# Altium PCB PCBdrone.PcbDoc
Units mm, origin at the board's own origin, x right, y up, seen from the top; angles counter-clockwise.
Board outline 100 x 100 mm, 2 copper layers (Top Layer, Bottom Layer); 56 components, 43 nets, 188 pads, 28 vias.
Unrouted connection lines stored in the file: 23.
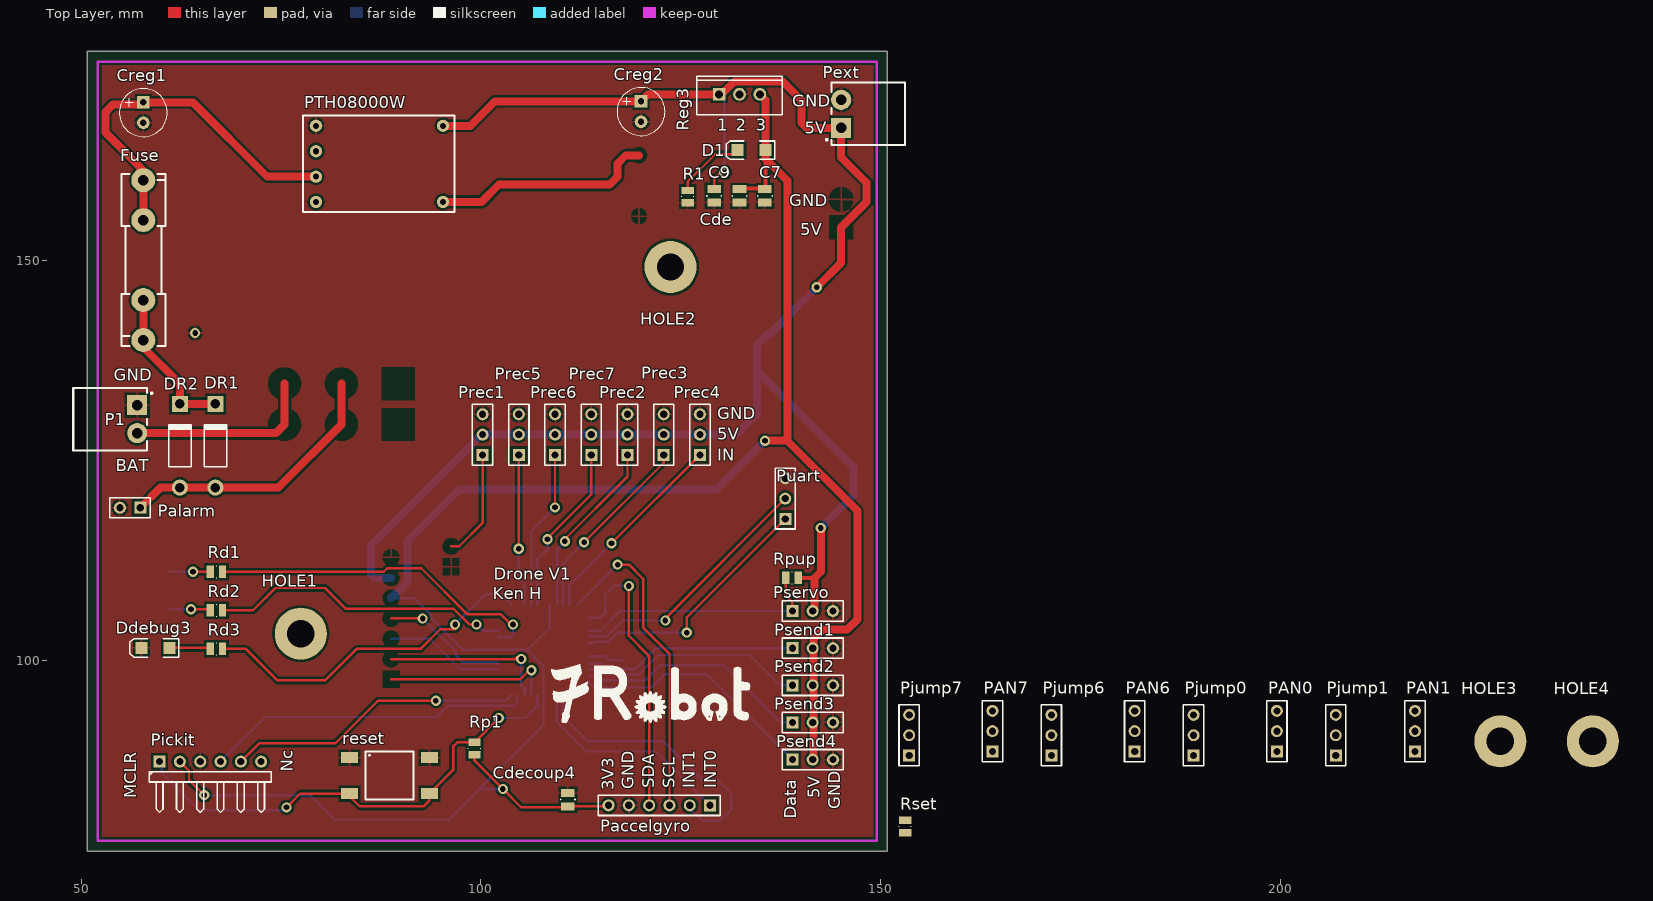
[diagram p0: Top Layer view]
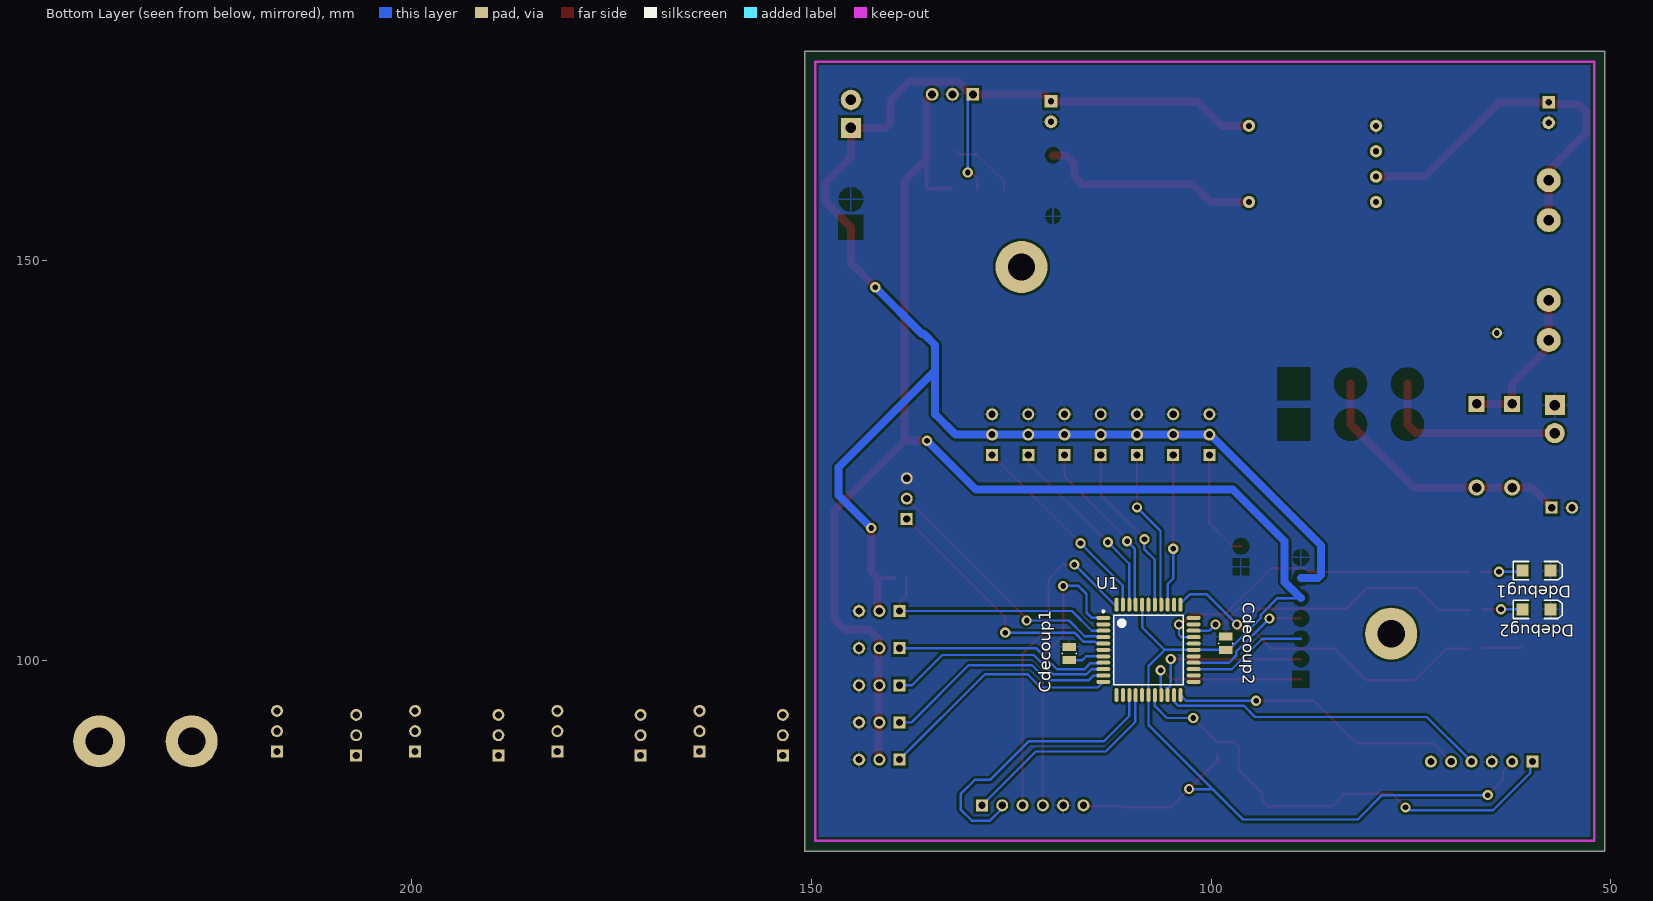
[diagram p1: Bottom Layer view, seen from below]

## Layer stack, top to bottom
Top Layer: signal copper 0.0356
Dielectric: dielectric 0.32, FR-4, Dk 4.8
Bottom Layer: signal copper 0.0356

## Board outline
50.8,76.2 150.8,76.2 150.8,176.2 50.8,176.2

## Design rules (kind name [scope] priority, off if disabled: settings)
Clearance [All] p1: gap=0.3
Height [All] p1: minheight=0 maxheight=100 prefheight=12.7
HoleSize [All] p1: absolutevalues=TRUE maxlimit=5 minlimit=0.025 maxpercent=80.000 minpercent=20.000
MinimumSolderMaskSliver [All] p1: minsoldermaskwidth=0.096
PolygonConnect [All] p1: connectstyle=Relief reliefconductorwidth=0.254 reliefentries=4 polygonreliefangle="90 Angle"
RoomDefinition DroneSch [InComponentClass('DroneSch')] p1: confinementstyle=ConfineIn formatcopy=TRUE lockcomponents=FALSE outline 152.019,84.582 244.348,84.582 244.348,97.79 152.019,97.79
RoomDefinition DroneRegul [InComponentClass('DroneRegul')] p2: confinementstyle=ConfineIn formatcopy=TRUE lockcomponents=FALSE outline 152.019,77.724 157.988,77.724 157.988,83.312 152.019,83.312
RoutingVias [All] p1: holewidth=0.6 width=1 viastyle="Through Hole" minholewidth=0.711 minwidth=1.27 maxholewidth=0.711 maxwidth=1.27
SilkscreenOverComponentPads [All] p1: minsilkscreentomaskgap=0.254
SolderMaskExpansion [All] p1: expansion=0.102
Width [All] p1: maxlimit=1 minlimit=0.3 preferedwidth=0.3
24 further rules are at their usual default settings.

## Classes and differential pairs
component class DroneSch: Cde Cdecoup1 Cdecoup2 Cdecoup4 Ddebug1 Ddebug2 Ddebug3 HOLE1 HOLE2 HOLE3 HOLE4 Paccelgyro PAN0 PAN1 PAN6 PAN7 Pext Pickit Pjump0 Pjump1 Pjump6 Pjump7 Prec1 Prec2 Prec3 Prec4 Prec5 Prec6 Prec7 Psend1 Psend2 Psend3 Psend4 Pservo Puart Rd1 Rd2 Rd3 reset Rp1 Rpup U1
component class DroneRegul: C7 C9 Creg1 Creg2 D1 DR1 DR2 Fuse P1 Palarm PTH08000W R1 Reg3 Rset

## Components (designator, comment, footprint, x,y, rotation, side; value= is the part's Value field where it differs from the comment)
C7 "CAP" C0805C 135.509,157.303 r90 top
C9 "CAP" C0805C 129.149,158.953 r270 top
Cde "CAP" C0805C 132.329,157.303 r90 top
Cdecoup1 "CAP" C0805C 117.729,101.727 r270 bottom
Cdecoup2 "CAP" C0805C 98.171,102.997 r270 bottom
Cdecoup4 "CAP" C0805C 110.871,83.439 r270 top
Creg1 "CAP Pol" RB.1/.3 57.785,169.799 r90 top
Creg2 "CAP Pol" RB.1/.3 120.015,169.926 r90 top
D1 "LED2" LED1206G 133.858,163.83 r180 top
Ddebug1 "LED" LED1206R 59.309,111.252 r180 bottom
Ddebug2 "LED" LED1206Y 59.309,106.426 r180 bottom
Ddebug3 "LED" LED1206G 59.309,101.6 r180 top
DR1 "Diode 1N4001" DO-41 66.802,126.873 r90 top
DR2 "Diode 1N4001" DO-41 62.357,126.873 r90 top
Fuse "200mA" "Fuse Holder 5x20mm" 57.785,140.081 r90 top
HOLE1 "Hole" SCREW 77.47,103.378 r0 top
HOLE2 "Hole" SCREW 123.698,149.225 r0 top
HOLE3 "Hole" SCREW 227.457,89.916 r0 top
HOLE4 "Hole" SCREW 239.014,89.916 r0 top
P1 "Batterie" TERM2W-3.5 57.023,131.953 r270 top
Paccelgyro "Header femelle" HDR1X6 128.651,81.915 r180 top
Palarm "alarme batterie faible" HDR1X2 57.404,119.126 r180 top
PAN0 "Header 3" HDR1X3 199.517,88.646 r90 top
PAN1 "Header 3" HDR1X3 216.789,88.646 r90 top
PAN6 "Header 3" HDR1X3 181.737,88.646 r90 top
PAN7 "Header 3" HDR1X3 163.957,88.646 r90 top
Pext "Header 2" TERM2W-3.5 145.034,166.624 r90 top
Pickit "PICkit" HDR1X6H 59.817,87.376 r0 top (schematic designator Ppic)
Pjump0 "Header 3" HDR1X3 189.103,88.138 r90 top
Pjump1 "Header 3" HDR1X3 206.883,88.138 r90 top
Pjump6 "Header 3" HDR1X3 171.323,88.138 r90 top
Pjump7 "Header 3" HDR1X3 153.543,88.138 r90 top
Prec1 "Header bat" HDR1X3 100.203,125.73 r90 top
Prec2 "Header thro" HDR1X3 118.322,125.73 r90 top
Prec3 "Header aile" HDR1X3 122.851,125.73 r90 top
Prec4 "Header elev" HDR1X3 127.381,125.73 r90 top
Prec5 "Header rudd" HDR1X3 104.733,125.73 r90 top
Prec6 "Header gear" HDR1X3 109.262,125.73 r90 top
Prec7 "Header aux1" HDR1X3 113.792,125.73 r90 top
Psend1 "Header 3" HDR1X3 138.938,101.566 r0 top
Psend2 "Header 3" HDR1X3 138.938,96.921 r0 top
Psend3 "Header 3" HDR1X3 138.938,92.275 r0 top
Psend4 "Header 3" HDR1X3 138.938,87.63 r0 top
Pservo "Header 3" HDR1X3 138.938,106.211 r0 top
PTH08000W "Reg1" PTH08000W 79.375,166.878 r0 top
Puart "Header 3" HDR1X3 138.049,117.729 r90 top
R1 "RES" C0805R 125.857,157.253 r90 top
Rd1 "RES" C0805R 67.691,111.125 r180 top
Rd2 "RES" C0805R 67.691,106.299 r180 top
Rd3 "RES" C0805R 67.691,101.473 r180 top
Reg3 "LM2937IMP-3.3" TO-220-AB 132.334,170.815 r0 top
reset "SPST-NO" SPST-NO 83.566,87.884 r270 top (schematic designator Srst)
Rp1 "RES" C0805R 99.187,89.789 r270 top
Rpup "RES" C0805R 138.12,110.363 r0 top
Rset "RES" C0805R 153.035,78.486 r90 top
U1 "dsPIC33FJ64MC804-I/PT" TQFP-PT44_N 107.823,101.346 r180 bottom

## Footprints (in the part's own frame and the unit in brackets; to place one, negate y for a bottom-side part, rotate by r counter-clockwise, add the part's x,y. Pads: shape width x height; smd on the part's side, far side on the other; paste and mask are expansions set on the pad)
C0805C [mm]
  rect 1x1.7 smd: 1(0,0) 2(1.65,0)
  silkscreen extent 0.8,-0.89 0.85,0.89, body extent -0.21,-0.61 1.79,0.64, height 0.78
C0805R [mm]
  rect 0.9x1.55 smd: 1(0,0) 2(1.55,0)
  silkscreen extent 0.73,-0.76 0.81,0.76, body extent -0.24,-0.62 1.76,0.63, height 0.78
DO-41 [mm] "Diode, Axial; Body 5.2 x 2.7 mm (LxDia. max), Lead Dia. 0.86 mm (max)"
  round 2 hole 1.2: 1(-5.23,0)
  rect 2x2 hole 1.2: 2(5.23,0)
  silkscreen extent -2.65,-1.4 2.75,1.4
"Fuse Holder 5x20mm" [mm] "Schurter Fuse Holder 0751.0110"
  round 3 hole 1.3: 1(0,0) 1(5,0) 2(15,0) 2(20,0)
  silkscreen extent -0.75,-2.75 20.75,2.75, body extent -0.51,-3.1 20.58,3.1, height 9.86
HDR1X2 [mm] "Connector; Header; 2 Position"
  rect 1.5x1.5 hole 0.9: 1(0,0)
  round 1.5 hole 0.9: 2(2.54,0)
  silkscreen extent -1.27,-1.27 3.81,1.27, body extent -1.17,-1.25 3.91,1.25, height 8.2
HDR1X3 [mm] "Connector; Header; 3 Position"
  rect 1.5x1.5 hole 0.9: 1(0,0)
  round 1.5 hole 0.9: 2(2.54,0) 3(5.08,0)
  silkscreen extent -1.27,-1.27 6.35,1.27, body extent -1.17,-1.25 6.45,1.25, height 8.2
HDR1X6 [mm] "Connector; Header; 6 Position"
  rect 1.5x1.5 hole 0.9: 1(0,0)
  round 1.5 hole 0.9: 2(2.54,0) 3(5.08,0) 4(7.62,0) 5(10.16,0) 6(12.7,0)
  silkscreen extent -1.27,-1.27 13.97,1.27, body extent -1.17,-1.25 14.07,1.25, height 8.2
HDR1X6H [mm] "Connector; Header; 6 Position; Right Angle"
  rect 1.5x1.5 hole 0.9: 1(0,0)
  round 1.5 hole 0.9: 2(2.54,0) 3(5.08,0) 4(7.62,0) 5(10.16,0) 6(12.7,0)
  silkscreen extent -1.27,-6.35 13.97,-1.27, body extent -1.17,-5.85 13.87,1.25, height 5.42
LED1206G [mm] "SMT LED; 2 Flat Leads; 3.2X1.6X1.1"
  rect 1.5x1.5 smd: 1(-1.75,0) 2(1.75,0)
  silkscreen extent -2.9,-1.15 3.2,1.15, body extent -1.6,-0.8 1.6,0.8, height 1.11
LED1206R [mm] "SMT LED; 2 Flat Leads; 3.2X1.6X1.1"
  rect 1.5x1.5 smd: 1(-1.75,0) 2(1.75,0)
  silkscreen extent -2.9,-1.15 3.2,1.15, body extent -1.6,-0.8 1.6,0.8, height 1.11
LED1206Y [mm] "SMT LED; 2 Flat Leads; 3.2X1.6X1.1"
  rect 1.5x1.5 smd: 1(-1.75,0) 2(1.75,0)
  silkscreen extent -2.9,-1.15 3.2,1.15, body extent -1.6,-0.8 1.6,0.8, height 1.11
PTH08000W [mil]
  round 60 hole 30: 1(0,0) 2(0,-125.2) 3(0,-250.39) 4(0,-374.8) 5(625.2,-374.8) 6(625.2,0)
  silkscreen extent -63,-425 681,51
RB.1/.3 [mil]
  rect 62x62 hole 31.5: 1(0,0)
  round 62 hole 31.5: 2(-100,0)
  silkscreen extent -168,-118 68,118
SCREW [mm] "Mounting Hole M3"
  round 6.5 hole 3.4: 1(0,0)
  body extent -2.89,-2.52 2.89,2.52, height 10
SPST-NO [mm] "Tactile Switch SPST-NO 6x6mm"
  rect 1.4x2.1 smd: 1(0,0) 2(4.5,0) 3(4.5,10) 4(0,10)
  silkscreen extent -0.75,2 5.25,8, body extent -0.75,0.93 5.25,9.08, height 5
TERM2W-3.5 [mm] "Horizontal Terminal Block, 2 ways, 3.5mm; Model 20.155MH/2"
  rect 2.5x2.5 hole 1.3: 1(0,0)
  round 2.5 hole 1.3: 2(3.5,0)
  silkscreen extent -2.15,-8 5.65,1.9, body extent -2.45,-8 5.95,1.2, height 7.25
TO-220-AB [mm] "TO, Thru-Hole, Vertical, Heatsink Mounted; 3 In-Line Leads; Pitch 2.54 mm"
  rect 1.6x1.6 hole 1: 1(-2.54,0)
  round 1.6 hole 1: 2(0,0) 3(2.54,0)
  silkscreen extent -5.35,-2.55 5.35,2.25
TQFP-PT44_N [mm] "Thin QFP, 44-Leads, Body 10x10mm, Pitch 0.8mm, IPC Medium Density"
  oval 1.75x0.5 smd: 1(-5.65,4) 2(-5.65,3.2) 3(-5.65,2.4) 4(-5.65,1.6) 5(-5.65,0.8) 6(-5.65,0) 7(-5.65,-0.8) 8(-5.65,-1.6) 9(-5.65,-2.4) 10(-5.65,-3.2) 11(-5.65,-4) 23(5.65,-4) 24(5.65,-3.2) 25(5.65,-2.4) 26(5.65,-1.6) 27(5.65,-0.8) 28(5.65,0) 29(5.65,0.8) 30(5.65,1.6) 31(5.65,2.4) 32(5.65,3.2) 33(5.65,4)
  oval 0.5x1.75 smd: 12(-4,-5.65) 13(-3.2,-5.65) 14(-2.4,-5.65) 15(-1.6,-5.65) 16(-0.8,-5.65) 17(0,-5.65) 18(0.8,-5.65) 19(1.6,-5.65) 20(2.4,-5.65) 21(3.2,-5.65) 22(4,-5.65) 34(4,5.65) 35(3.2,5.65) 36(2.4,5.65) 37(1.6,5.65) 38(0.8,5.65) 39(0,5.65) 40(-0.8,5.65) 41(-1.6,5.65) 42(-2.4,5.65) 43(-3.2,5.65) 44(-4,5.65)
  silkscreen extent -5.77,-4.35 4.35,4.95, body extent -6,-6 6,6, height 1.05

## Part data
C7 C9 Cde Cdecoup1 Cdecoup2 Cdecoup4: "Capacitor"
Creg1 Creg2: "Polarized Capacitor"
D1: "Typical RED, GREEN, YELLOW, AMBER GaAs LED"
Ddebug1 Ddebug2 Ddebug3: "Typical LED"
DR1 DR2: "1 Amp General Purpose Rectifier"
Fuse: library part Fuse, "Standard Fuse Holder"
HOLE1 HOLE2 HOLE3 HOLE4: "Mounting Hole for screws"
P1 Palarm: library part "Header 2", "Header, 2-Pin"
Paccelgyro: library part "Header 6", "Header, 6-Pin"
PAN0 PAN1 PAN6 PAN7 Pjump0 Pjump1 Pjump6 Pjump7 Psend1 Psend2 Psend3 Psend4 Pservo Puart: "Header, 3-Pin"
Pext: "Header, 2-Pin"
Pickit: library part "Header ICSP", "Header, 6-Pin, Right Angle"
Prec1 Prec2 Prec3 Prec4 Prec5 Prec6 Prec7: library part "Header 3", "Header, 3-Pin"
PTH08000W: library part PTH08000W
R1 Rd1 Rd2 Rd3 Rp1 Rpup Rset: "Resistor"
Reg3: "500 mA Low Dropout Regulator"
reset: "Tactile Switch 7.3mm, SMD"
U1: "High-Performance 16-bit Digital Signal Controller, 64 KB Flash, 16 KB RAM, 44-Pin TQFP, Industrial Temperature"

## Via types
v1: diameter 1.27, hole 0.711, Top Layer to Bottom Layer, 28 vias

## Nets (pads, with @x,y where several pads share a name; then routed paths per layer and width w, separated by ;. In a path a pad name is that pad's centre, name@x,y a point inside that pad or via, vN(x,y) a via of type N, cw(c..) or ccw(c..) an arc to the next point about the centre after c; other vN are vias at no path point)
3V3: C7.2 Cde.2 Cdecoup2.2 Cdecoup4.2 D1.1 Paccelgyro.6 Pickit.2 Pjump0.1 Pjump1.1 Pjump6.1 Pjump7.1 Reg3.3 Rp1.2 U1.17 U1.28 U1.40 | length 273.1
  Top Layer w0.3: Pickit.2 63.5,86.233 63.5,85.09 v1(65.405,83.185) ; Rp1.2 99.187,87.503 v1(102.743,83.947) 105.029,81.661 110.743,81.661 Cdecoup4.2 Paccelgyro.6@115.825,81.789
  Top Layer w0.5: Cde.2@132.428,159.052 135.608,159.052 135.608,162.715
  Top Layer w1: Reg3.3 135.608,170.081 135.608,162.715 138.303,160.02 138.303,127.508 ; v1(135.509,127.508) 138.303,127.508 ; 141.605,87.757 141.605,102.743 142.748,103.886 145.796,103.886 147.066,105.156 147.066,118.745 138.303,127.508
  Bottom Layer w0.3: v1(65.405,83.185) 78.613,83.185 81.661,80.137 96.012,80.137 99.822,83.947 ; 88.773,107.823 91.704,107.823 93.795,105.732 93.795,105.341 Cdecoup2.2@97.789,101.347 ; Cdecoup2.2 U1.28 105.791,101.346 ; v1(102.743,83.947) 99.822,83.947 ; U1.40 108.623,104.178 105.791,101.346 ; 99.822,83.947 107.823,91.948 U1.17 107.823,99.314 105.791,101.346
  Bottom Layer w0.5: Cdecoup2.2 Cdecoup2.2
  Bottom Layer w1: 88.773,107.823 90.805,109.855 90.805,114.935 97.282,121.412 129.413,121.412 v1(135.509,127.508)
5V: C9.1 Creg2.1 Pext.1 Pjump0.3 Pjump1.3 Pjump6.3 Pjump7.3 Prec1.2 Prec2.2 Prec3.2 Prec4.2 Prec5.2 Prec6.2 Prec7.2 Pservo.2 PTH08000W.6 Reg3.1 Rpup.2 | length 212.3
  Top Layer w0.3: C9.1 129.149,160.264 129.921,161.036 v1(130.429,161.036)
  Top Layer w0.5: Rpup.2 141.732,110.363
  Top Layer w1: PTH08000W.6 98.679,166.878 101.727,169.926 Creg2.1 120.904,170.815 Reg3.1 130.071,170.815 131.671,172.415 137.744,172.415 140.081,170.078 140.081,167.259 140.716,166.624 Pext.1 145.034,162.941 148.209,159.766 148.209,157.353 145.034,154.178 145.034,149.733 v1(141.986,146.685) ; Pservo.2@141.732,106.465 141.732,110.363 142.494,111.125 v1(142.494,116.586)
  Bottom Layer w0.3: Reg3.1 130.429,170.18 v1(130.429,161.036)
  Bottom Layer w1: 88.773,110.363 86.614,110.363 86.233,110.744 86.233,114.391 100.112,128.27 Prec1.2 Prec5.2 Prec6.2 Prec7.2 Prec2.2 Prec3.2 Prec4.2 131.953,128.27 134.493,130.81 134.493,136.271 ; v1(141.986,146.685) 136.144,140.843 135.89,140.843 134.493,139.446 134.493,136.271 ; v1(142.494,116.586) 146.558,120.65 146.558,124.206 134.493,136.271
AN0: PAN0.1 U1.19 | length 21
  Top Layer w0.3: 88.773,97.663 104.902,97.663 106.045,98.806 v1(106.299,98.806)
  Bottom Layer w0.3: U1.19@106.299,95.772 v1(106.299,98.806)
AN1: PAN1.1 U1.20 | length 21.6
  Top Layer w0.3: 88.773,100.203 104.267,100.203 104.521,100.457 104.775,100.457 v1(105.029,100.203)
  Bottom Layer w0.3: v1(105.029,100.203) 105.029,96.905 105.323,96.611 U1.20@105.323,95.996 ; U1.20@105.523,95.796 105.523,96.611
AN6: PAN6.1 U1.25 | length 15
  Bottom Layer w0.3: 88.773,102.743 93.599,102.743 97.409,98.933 102.16,98.933 U1.25
AN7: PAN7.1 U1.26 | length 16.1
  Top Layer w0.3: 88.773,105.283 v1(92.71,105.283)
  Bottom Layer w0.3: v1(92.71,105.283) 96.871,101.122 96.871,100.631 97.756,99.746 U1.26 U1.26@102.088,99.661
BAT: Creg1.1 Fuse.2 PTH08000W.3 | length 46.2
  Top Layer w1: Fuse.2@57.785,155.081 57.785,160.081 57.785,161.29 53.05,166.025 53.05,168.62 53.975,169.545 57.531,169.545 Creg1.1 64.008,169.799 73.289,160.518 PTH08000W.3
GND: C7.1 C9.2 Cde.1 Cdecoup1.1 Cdecoup2.1 Cdecoup4.1 Creg1.2 Creg2.2 Ddebug1.2 Ddebug2.2 Ddebug3.2 P1.1 Paccelgyro.5 Palarm.2 PAN0.3 PAN1.3 PAN6.3 PAN7.3 Pext.2 Pickit.3 Prec1.3 Prec2.3 Prec3.3 Prec4.3 Prec5.3 Prec6.3 Prec7.3 Psend1.3 Psend2.3 Psend3.3 Psend4.3 Pservo.3 PTH08000W.1 Puart.3 R1.1 Reg3.2 reset.1 reset.4 Rset.2 U1.6 U1.16 U1.29 U1.39
  other v1: 64.262,140.97
I2CSCL: Paccelgyro.3 U1.44 | length 40.7
  Top Layer w0.3: v1(117.094,112.014) 118.491,112.014 120.269,110.236 120.269,104.14 123.571,100.838 Paccelgyro.3
  Bottom Layer w0.3: 112.076,106.996 v1(117.094,112.014)
I2CSDA: Paccelgyro.4 U1.1 | length 36.5
  Top Layer w0.3: v1(118.491,109.347) 118.491,103.124 121.031,100.584 Paccelgyro.4
  Bottom Layer w0.3: U1.1 114.871,105.346 115.57,106.045 115.57,108.331 116.586,109.347 v1(118.491,109.347)
ICAILE: Prec3.1 U1.42 | length 24
  Top Layer w0.3: v1(112.903,114.808) 122.851,124.756 Prec3.1
  Bottom Layer w0.3: U1.42 110.223,112.128 v1(112.903,114.808)
ICAUX1: Prec7.1 U1.38 | length 21.5
  Top Layer w0.3: v1(108.331,115.189) 108.331,115.316 113.792,120.777 Prec7.1
  Bottom Layer w0.3: U1.38 107.023,112.611 108.331,113.919 v1(108.331,115.189)
ICELEV: Prec4.1 U1.43 | length 25.5
  Top Layer w0.3: v1(116.332,114.681) Prec4.1
  Bottom Layer w0.3: U1.43 111.023,109.372 v1(116.332,114.681)
ICGEAR: Prec6.1 U1.37 | length 20
  Top Layer w0.3: v1(109.262,119.168) Prec6.1
  Bottom Layer w0.3: U1.37 106.323,107.096 106.323,116.229 v1(109.262,119.168)
ICRUDD: Prec5.1 U1.36 | length 19
  Top Layer w0.3: v1(104.733,114.004) Prec5.1
  Bottom Layer w0.3: v1(104.733,114.004) 104.733,110.278 105.423,109.588 U1.36
ICTHRO: Prec2.1 U1.41 | length 22.8
  Top Layer w0.3: v1(110.49,114.935) 110.236,114.935 118.322,123.021 Prec2.1
  Bottom Layer w0.3: U1.41 109.523,107.096 109.523,113.968 v1(110.49,114.935)
INT0ACCEL: Paccelgyro.1 U1.15 | length 26.8
  Bottom Layer w0.3: U1.15@109.474,95.645 109.474,92.329 113.157,88.646 121.92,88.646 Paccelgyro.1
INT1ACCEL: Paccelgyro.2 U1.14 | length 36.4
  Bottom Layer w0.3: U1.14 110.223,93.104 113.411,89.916 122.809,89.916 127.635,85.09 129.54,85.09 131.318,83.312 131.318,81.407 129.921,80.01 127.635,80.01 126.111,81.534 Paccelgyro.2
MCLR: Pickit.1 reset.2 reset.3 Rp1.1 U1.18 | length 61
  Top Layer w0.3: v1(75.692,81.661) 77.415,83.384 reset.2 83.566,83.058 84.836,81.788 92.837,81.788 93.566,82.517 reset.3 ; reset.3@93.671,83.384 reset.3 ; v1(102.235,92.837) Rp1.1 97.028,89.789 96.52,89.281 96.52,86.338 reset.3
  Bottom Layer w0.3: Pickit.1 60.071,87.122 60.071,85.979 64.77,81.28 75.311,81.28 v1(75.692,81.661) ; v1(102.235,92.837) 105.537,92.837 107.023,94.323 U1.18
NetCdecoup1_2: Cdecoup1.2 U1.7 | length 4.5
  Bottom Layer w0.3: U1.7 115.608,100.546 116.077,100.077 Cdecoup1.2
NetD1_2: D1.2 R1.2 | length 9
  Top Layer w0.3: R1.2 125.857,159.893 129.286,163.322 131.6,163.322 D1.2
NetDdebug1_1: Ddebug1.1 Rd1.2 | length 5.1
  Top Layer w0.3: v1(64.008,111.125) Rd1.2
  Bottom Layer w0.3: Ddebug1.1 61.186,111.125 v1(64.008,111.125)
NetDdebug2_1: Ddebug2.1 Rd2.2 | length 5
  Top Layer w0.3: v1(63.754,106.426) Rd2.2@66.014,106.426
  Bottom Layer w0.3: Ddebug2.1 v1(63.754,106.426)
NetDdebug3_1: Ddebug3.1 Rd3.2 | length 5
  Top Layer w0.3: Ddebug3.1 Rd3.2@66.014,101.6
NetDR1_1: DR1.1 DR2.1 P1.2 Palarm.1 | length 58.5
  Top Layer w1: P1.2 74.373,128.453 75.45,129.53 75.45,134.63 ; Palarm.1 59.921,121.643 DR2.1 DR1.1 74.663,121.643 82.55,129.53 82.55,134.63
NetDR1_2: DR1.2 DR2.2 Fuse.1 | length 19.3
  Top Layer w1: Fuse.1@57.785,145.081 57.785,140.081 57.785,139.192 62.357,134.62 DR2.2 DR1.2
NetPAN0_2: PAN0.2 Pjump0.2
NetPAN1_2: PAN1.2 Pjump1.2
NetPAN6_2: PAN6.2 Pjump6.2
NetPAN7_2: PAN7.2 Pjump7.2
NetPTH08000W_5: PTH08000W.5 Rset.1 | length 27.9
  Top Layer w1: PTH08000W.5 100.081,157.358 102.235,159.512 116.078,159.512 117.094,160.528 117.094,162.179 118.11,163.195 119.761,163.195
NetRd1_1: Rd1.1 U1.30 | length 42.7
  Top Layer w0.3: Rd1.1 87.838,111.125 88.276,111.563 92.526,111.563 98.298,105.791 102.489,105.791 103.759,104.521 v1(104.013,104.521)
  Bottom Layer w0.3: U1.30 103.708,102.946 104.013,103.251 v1(104.013,104.521)
NetRd2_1: Rd2.1 U1.31 | length 37.9
  Top Layer w0.3: Rd2.1 71.501,106.299 74.295,109.093 80.518,109.093 83.128,106.483 96.59,106.483 98.552,104.521 v1(99.441,104.521)
  Bottom Layer w0.3: v1(99.441,104.521) 100.203,103.759 102.16,103.759 U1.31
NetRd3_1: Rd3.1 U1.34 | length 43.2
  Top Layer w0.3: Rd3.1 70.612,101.473 74.549,97.536 80.518,97.536 84.455,101.473 92.456,101.473 94.904,103.921 96.774,103.921 v1(96.774,104.521)
  Bottom Layer w0.3: v1(96.774,104.521) 100.584,108.331 102.616,108.331 103.823,107.124 U1.34
PGC1: Pickit.5 U1.22 | length 37.3
  Top Layer w0.3: Pickit.5 72.263,89.662 81.788,89.662 87.122,94.996 v1(94.361,94.996)
  Bottom Layer w0.3: v1(94.361,94.996) 103.123,94.996 U1.22
PGD1: Pickit.4 U1.21 | length 41
  Bottom Layer w0.3: Pickit.4 73.025,92.964 94.488,92.964 95.895,94.371 104.113,94.371 104.523,94.781 U1.21@104.523,95.596
PWM1: Psend1.1 U1.8 | length 26.8
  Bottom Layer w0.3: U1.8@113.524,99.695 115.062,99.695 115.824,98.933 119.253,98.933 121.886,101.566 Psend1.1
PWM2: Psend2.1 U1.9 | length 28.3
  Bottom Layer w0.3: U1.9 114.922,98.946 115.57,98.298 119.761,98.298 122.174,100.711 133.604,100.711 137.394,96.921 Psend2.1
PWM3: Psend3.1 U1.10 | length 29.5
  Bottom Layer w0.3: U1.10 114.706,98.146 115.316,97.536 120.523,97.536 122.428,99.441 130.302,99.441 137.468,92.275 Psend3.1
PWM4: Psend4.1 U1.11 | length 30.9
  Bottom Layer w0.3: U1.11 114.172,96.647 121.285,96.647 122.936,98.298 128.27,98.298 Psend4.1
PWMSERVO: Pservo.1 Rpup.1 U1.3 | length 31
  Top Layer w0.3: Rpup.1 138.12,108.133 138.938,107.315 Pservo.1
  Bottom Layer w0.3: U1.3 114.922,103.746 117.387,106.211 Pservo.1
RX: Puart.2 U1.4 | length 31.8
  Top Layer w0.3: v1(123.063,105.029) 123.063,105.283 Puart.2
  Bottom Layer w0.3: U1.4@113.573,103.046 115.786,103.046 117.769,105.029 v1(123.063,105.029)
TX: Puart.1 U1.5 | length 32.1
  Top Layer w0.3: v1(125.73,103.505) 125.73,105.41 Puart.1
  Bottom Layer w0.3: U1.5 113.573,102.246 114.388,102.246 114.504,102.362 115.951,102.362 117.094,103.505 v1(125.73,103.505)
pads on no net: HOLE1.1 HOLE2.1 HOLE3.1 HOLE4.1 Pickit.6 Prec1.1 Psend1.2 Psend2.2 Psend3.2 Psend4.2 PTH08000W.2 PTH08000W.4 U1.2 U1.12 U1.13 U1.23 U1.24 U1.27 U1.32 U1.33 U1.35
copper on no net: | length 13.7
  Top Layer w0.3: 96.266,114.3 97.282,114.3 100.203,117.221 100.203,125.73

## Polygon pours and split planes (outlines as drawn)
GND on Bottom Layer "BOTGND" (solid, pour order 4): 52.1,174.498 52.1,78.105 52.481,77.724 149.5,77.724 149.5,174.498 149.098,174.9
GND on Top Layer "TOPGND" (solid, pour order 2): 52.324,174.9 52.1,174.676 52.1,77.5 149.5,77.5 149.5,174.9

## Keep-outs
Keep-Out Layer:
  lines w0.3: 52.1,77.5 52.1,174.9 149.5,174.9 149.5,77.5 52.1,77.5

## Silkscreen, mask and mechanical layers (free items; w line width, h text height)
Top Overlay:
  drawing of 1901 lines, arcs and shapes, not listed
  text "GND" at 138.938,169.291 h1.52
  text "5V" at 140.462,165.862 h1.52
  text "GND" at 138.557,156.845 h1.52
  text "5V" at 139.954,153.162 h1.52
  text "GND" at 54.102,135.001 h1.52
  text "GND" at 129.54,130.175 h1.52
  text "5V" at 129.54,127.635 h1.52
  text "IN" at 129.54,124.968 h1.52
  text "BAT" at 54.356,123.698 h1.52
  text "Drone V1" at 101.6,110.109 h1.52
  text "Ken H" at 101.473,107.696 h1.52
  text "Nc" at 76.454,86.106 h1.52 r90
  text "SDA" at 121.666,84.074 h1.52 r90
  text "SCL" at 124.206,84.074 h1.52 r90
  text "INT1" at 126.746,84.074 h1.52 r90
  text "INT0" at 129.413,84.074 h1.52 r90
  text "GND" at 119.126,83.947 h1.52 r90
  text "3V3" at 116.586,83.82 h1.52 r90
  text "MCLR" at 56.896,82.804 h1.52 r90
  text "5V" at 142.367,82.804 h1.52 r90
  text "GND" at 144.907,81.407 h1.52 r90
  text "Data" at 139.446,80.264 h1.52 r90
Drill Drawing:
  text ".LEGEND" at 155.88,81.28 h1.52
  text "Drill Drawing." at 155.88,78.74 h1.52

## Dimensions
52.1,77.5 to 52.1,174.9 on Mechanical 1
52.1,77.5 to 149.5,77.5 on Mechanical 1

## Text inside footprints (layer, text, board x,y; h text height)
Reg3: Top Overlay "1" at 129.544,166.29 h1.5; Top Overlay "2" at 131.834,166.29 h1.5; Top Overlay "3" at 134.374,166.29 h1.5